# EAGLE board lt mikro workshop mask (EAGLE 7.6.0)
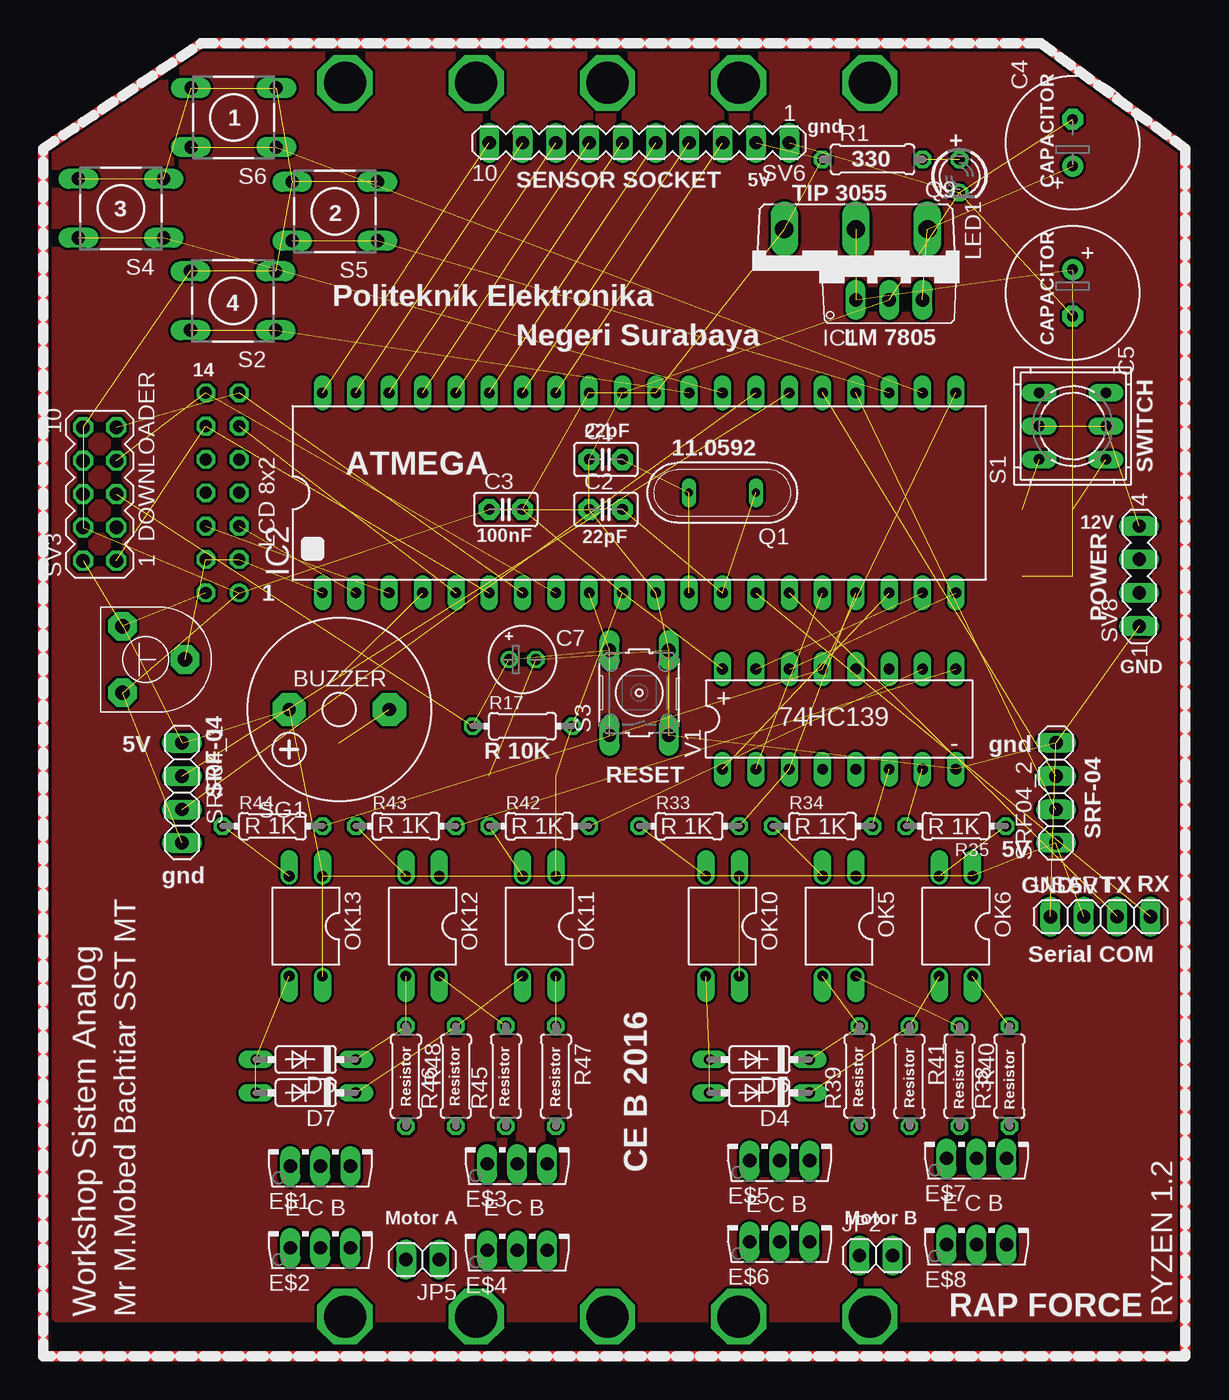
[diagram p0: board, top side]
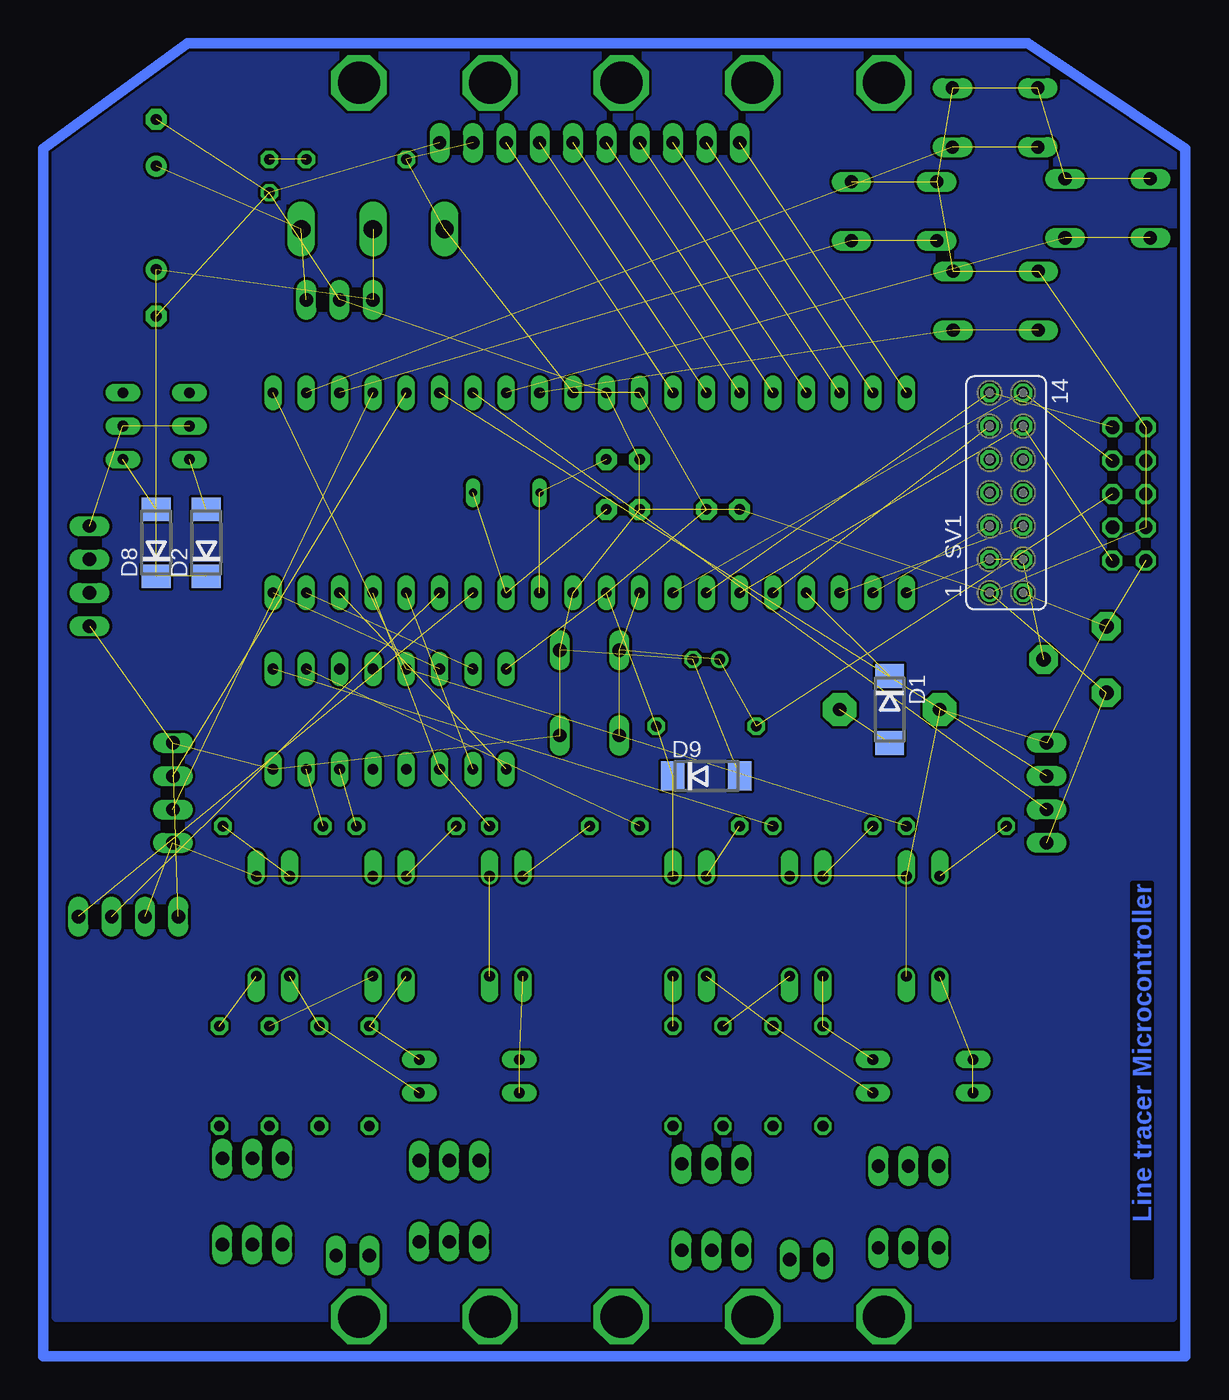
[diagram p1: board, bottom side, seen from below]

No outline drawn. Coordinates in mm, seen from the top.
Copper layers (1*16): Top 0.035mm / dielectric 1.5mm / Bottom 0.035mm
Design rules "default": minimum track width 10mil, minimum drill 24mil, track to track 8mil, track to pad 8mil, pad to pad 8mil, via to via 8mil, smd to smd 8mil, copper to edge 40mil, drill to drill 8mil, minimum pad ring 10mil, minimum via ring 8mil, stop-mask expansion 4mil, vias tented up to drill 0mil, thermal gap 10mil

## Footprints (pad centres in the part's own frame; a part is rotated, then mirrored left to right if it is on the bottom)
C2.5-2 = drill 0.813 pad 1.6 octagon: 1 -1.27,0; 2 1.27,0
E3,5-10 = drill 0.813 pad 1.6: + -1.778,0 | drill 0.813 pad 1.6 octagon: - 1.778,0
E2-5 = drill 0.813 pad 1.27: + -1.016,0 | drill 0.813 pad 1.27 octagon: - 1.016,0
DO214AA = smd 1.8 x 2.2: A 2.55,0; C -2.55,0
DO35-7 = drill 0.813 long: A 3.81,0; C -3.81,0
TO126AV = drill 1.016 long: B 2.286,-1.27; C 0,-1.27; E -2.286,-1.27
TO220V = drill 1.016 long: 1 -2.54,-2.54; 2 0,-2.54; 3 2.54,-2.54
DIL40 = drill 0.813 long: 1 -24.13,-7.62; 2 -21.59,-7.62; 3 -19.05,-7.62; 4 -16.51,-7.62; 5 -13.97,-7.62; 6 -11.43,-7.62; 7 -8.89,-7.62; 8 -6.35,-7.62; 9 -3.81,-7.62; 10 -1.27,-7.62; 11 1.27,-7.62; 12 3.81,-7.62; 13 6.35,-7.62; 14 8.89,-7.62; 15 11.43,-7.62; 16 13.97,-7.62; 17 16.51,-7.62; 18 19.05,-7.62; 19 21.59,-7.62; 20 24.13,-7.62; 21 24.13,7.62; 22 21.59,7.62; 23 19.05,7.62; 24 16.51,7.62; 25 13.97,7.62; 26 11.43,7.62; 27 8.89,7.62; 28 6.35,7.62; 29 3.81,7.62; 30 1.27,7.62; 31 -1.27,7.62; 32 -3.81,7.62; 33 -6.35,7.62; 34 -8.89,7.62; 35 -11.43,7.62; 36 -13.97,7.62; 37 -16.51,7.62; 38 -19.05,7.62; 39 -21.59,7.62; 40 -24.13,7.62
1X02 = drill 1.016 long: 1 -1.27,0; 2 1.27,0
LED3MM = drill 0.813 octagon: A -1.27,0; K 1.27,0
DIL04 = drill 0.813 offset: 1 -1.27,-3.81; 2 1.27,-3.81; 3 1.27,3.81; 4 -1.27,3.81
QS = drill 0.61 long: 1 -2.54,0; 2 2.54,0
TOP3AV = drill 1.397 long: B -5.461,-3.175; C 0,-3.175; E 5.461,-3.175
0207/7 = drill 0.813 octagon: 1 -3.81,0; 2 3.81,0
0204/7 = drill 0.813 octagon: 1 -3.81,0; 2 3.81,0
9077-2 = drill 0.813 long: 1 -2.54,2.54; 2 0,2.54; 3 2.54,2.54; 4 -2.54,-2.54; 5 0,-2.54; 6 2.54,-2.54
DTS-6 = drill 1 long: 1 -3.25,2.25; 2 3.25,2.25; 3 -3.25,-2.25; 4 3.25,-2.25
B3F-10XX = drill 1.016 long: 1 -3.251,2.261; 2 3.251,2.261; 3 -3.251,-2.261; 4 3.251,-2.261
F/CM12P = drill 1.016 pad 2.54 octagon: + 3.81,0; - -3.81,0
1X04 = drill 1.016 long: 1 -3.81,0; 2 -1.27,0; 3 1.27,0; 4 3.81,0
FE07-2 = drill 0.914: 1 -7.62,1.27 | drill 0.914 octagon: 2 -7.62,-1.27; 3 -5.08,1.27; 4 -5.08,-1.27; 5 -2.54,1.27; 6 -2.54,-1.27; 7 0,1.27; 8 0,-1.27; 9 2.54,1.27; 10 2.54,-1.27; 11 5.08,1.27; 12 5.08,-1.27; 13 7.62,1.27; 14 7.62,-1.27
MA05-2 = drill 1.016 octagon: 1 -5.08,-1.27; 2 -5.08,1.27; 3 -2.54,-1.27; 4 -2.54,1.27; 5 0,-1.27; 6 0,1.27; 7 2.54,-1.27; 8 2.54,1.27; 9 5.08,-1.27; 10 5.08,1.27
MA10-1 = drill 1.016 long: 1 -11.43,0; 2 -8.89,0; 3 -6.35,0; 4 -3.81,0; 5 -1.27,0; 6 1.27,0; 7 3.81,0; 8 6.35,0; 9 8.89,0; 10 11.43,0
MA04-1 = drill 1.016 long: 1 -3.81,0; 2 -1.27,0; 3 1.27,0; 4 3.81,0
TRIMPOT = drill 1.1 pad 2.184 octagon: 1 -2.538,1.271; 2 0,-3.5; 3 2.536,1.271
DIL16 = drill 0.813 long: 1 -8.89,-3.81; 2 -6.35,-3.81; 3 -3.81,-3.81; 4 -1.27,-3.81; 5 1.27,-3.81; 6 3.81,-3.81; 7 6.35,-3.81; 8 8.89,-3.81; 9 8.89,3.81; 10 6.35,3.81; 11 3.81,3.81; 12 1.27,3.81; 13 -1.27,3.81; 14 -3.81,3.81; 15 -6.35,3.81; 16 -8.89,3.81

## Placement (x,y rotation side)
C1  22pF  [C2.5-2]  42.85,67.31 0 top
C2  22pF  [C2.5-2]  42.85,63.5 0 top
C3  100nF  [C2.5-2]  35.23,63.5 0 top
C4  [E3,5-10]  78.41,91.44 90 top
C5  [E3,5-10]  78.41,80.01 270 top
C7  10uF  [E2-5]  36.5,52.07 0 top
D1  [DO214AA]  22.53,48.26 270 bottom
D2  [DO214AA]  74.6,60.96 90 bottom
D4  1N4148DO35-7  [DO35-7]  54.55,19.05 180 top
D5  1N4148DO35-7  [DO35-7]  54.55,21.59 180 top
D6  1N4148DO35-7  [DO35-7]  19.99,21.59 180 top
D7  1N4148DO35-7  [DO35-7]  19.99,19.05 180 top
D8  [DO214AA]  78.41,60.96 90 bottom
D9  [DO214AA]  36.5,43.18 0 bottom
E$1  [TO126AV]  21.1,14.73 0 top
E$2  [TO126AV]  21.1,8.51 0 top
E$3  [TO126AV]  36.09,14.91 0 top
E$4  [TO126AV]  36.09,8.32 0 top
E$5  [TO126AV]  56.08,15.16 0 top
E$6  [TO126AV]  56.08,8.98 0 top
E$7  [TO126AV]  71.09,15.33 0 top
E$8  [TO126AV]  71.09,8.77 0 top
IC1  7805TV  [TO220V]  64.44,82.01 0 top
IC2  MEGA16-P  [DIL40]  45.39,64.77 0 top
JP2  [1X02]  63.44,6.65 0 top
JP5  [1X02]  28.88,6.35 180 top
LED1  [LED3MM]  69.79,88.9 270 top
OK5  LTV816  [DIL04]  60.63,31.75 180 top
OK6  LTV816  [DIL04]  69.52,31.75 180 top
OK10  LTV816  [DIL04]  51.74,31.75 180 top
OK11  LTV816  [DIL04]  37.77,31.75 180 top
OK12  LTV816  [DIL04]  28.88,31.75 180 top
OK13  LTV816  [DIL04]  19.99,31.75 180 top
Q1  11.0592MHz  [QS]  51.74,64.77 180 top
Q9  TIP3055  [TOP3AV]  61.9,81.68 180 top
R1  [0207/7]  63.17,90.17 0 top
R17  10K  [0204/7]  36.5,46.99 0 top
R33  1K  [0204/7]  49.2,39.37 0 top
R34  1K  [0204/7]  59.36,39.37 0 top
R35  1K  [0204/7]  69.52,39.37 180 top
R38  [0207/7]  73.6,20.32 90 top
R39  [0207/7]  62.17,20.32 90 top
R40  [0207/7]  69.79,20.32 270 top
R41  [0207/7]  65.98,20.32 270 top
R42  1K  [0204/7]  37.77,39.37 0 top
R43  1K  [0204/7]  27.61,39.37 0 top
R44  1K  [0204/7]  17.45,39.37 0 top
R45  [0207/7]  35.23,20.32 90 top
R46  [0207/7]  31.42,20.32 90 top
R47  [0207/7]  39.04,20.32 270 top
R48  [0207/7]  27.61,20.32 270 top
S1  9077-2  [9077-2]  78.41,69.85 90 top
S2  DTS-6  [DTS-6]  14.45,79.4 180 top
S3  [B3F-10XX]  45.39,49.53 90 top
S4  DTS-6  [DTS-6]  5.91,86.44 180 top
S5  DTS-6  [DTS-6]  22.19,86.22 180 top
S6  DTS-6  [DTS-6]  14.49,93.36 180 top
SG1  F/CM12P  [F/CM12P]  22.53,48.26 180 top
SRF04_1  [1X04]  10.56,41.91 270 top
SRF04_2  [1X04]  77.14,41.91 90 top
SV1  LCD 8x2  [FE07-2]  13.64,64.77 90 bottom
SV3  ISP  [MA05-2]  4.29,64.67 90 top
SV6  [MA10-1]  45.39,91.44 180 top
SV8  [MA04-1]  83.49,58.42 90 top
U$1  TRIMPOT  [TRIMPOT]  7.29,52.07 90 top
USART  [1X04]  80.54,32.47 0 top
V1  74139N  [DIL16]  60.63,47.53 0 top

## Library data of the parts
C1-C3 = capacitor-wima
C4 C5 C7 = rcl
D1 D2 D4-D9 = diode
E$1-E$8 Q9 = transistor-power
IC1 = linear
IC2 = atmel
JP2 JP5 SRF04_1 SRF04_2 USART = pinhead
LED1 = led
OK5 OK6 OK10-OK13 = optocoupler
Q1 = special
R1 R17 R33-R35 R38-R48 = resistor
S1 = switch-misc
S2 S4-S6 = switch-tact
S3 = switch-omron
SG1 = buzzer
SV1 = con-lsta
SV3 SV6 = con-lstb
SV8 = con-lstb; OC_FARNELL: unknown; OC_NEWARK: unknown
U$1 = trimpot
V1 = 74ttl-din

## Nets
GND: C1.1 C2.1 C3.1 C4.- C5.- C7.- D9.A IC1.2 IC2.11 IC2.31 LED1.K S2.3 S2.4 S3.3 S3.4 S4.3 S4.4 S5.3 S5.4 S6.3 S6.4 SRF04_1.4 SRF04_2.4 SV1.1 SV3.4 SV3.6 SV3.8 SV3.10 SV6.1 SV8.1 U$1.1 USART.1 V1.8
MISO: IC2.7 SV1.13 SV3.9
MOSI: IC2.6 SV1.12 SV3.1
N$2: LED1.A R1.2
N$3: D8.A S1.4
N$4: D1.C IC2.4
N$5: SV1.8
N$6: SV1.10
N$7: SV1.7
N$9: C2.2 IC2.13 Q1.1
N$10: C1.2 IC2.12 Q1.2
N$11: D2.A S1.1
N$14: OK10.2 R33.1
N$17: OK5.2 R34.1
N$18: OK6.2 R35.1
N$19: C4.+ IC1.3 Q9.B
N$21: JP2.1
N$22: S1.2 S1.5 SV8.4
N$23: SV1.9
N$24: JP2.2
N$25: R40.2
N$26: R38.1
N$27: R39.1
N$48: R35.2 V1.7
N$49: R34.2 V1.6
N$50: R41.2
N$52: IC2.40 SV6.10
N$53: IC2.33 SV6.3
N$54: IC2.34 SV6.4
N$55: IC2.35 SV6.5
N$56: IC2.36 SV6.6
N$57: IC2.37 SV6.7
N$58: D1.A SG1.-
N$59: OK5.4 R40.1
N$60: IC2.38 SV6.8
N$61: IC2.39 SV6.9
N$62: D5.C OK5.3 R39.2
N$63: OK6.4 R38.2
N$64: D4.C OK6.3 R41.1
N$65: D4.A D5.A OK10.3
N$66: OK12.2 R43.1
N$67: OK11.2 R42.1
N$68: OK13.2 R44.1
N$70: R43.2 V1.9
N$71: R42.2 V1.10
N$72: JP5.1
N$73: JP5.2
N$74: R47.2
N$75: R45.1
N$76: R46.1
N$77: R48.2
N$78: OK11.4 R47.1
N$79: D7.C OK11.3 R46.2
N$80: OK12.4 R45.2
N$81: D6.C OK12.3 R48.1
N$82: D6.A D7.A OK13.3
PB0: IC2.1 SV1.3 SV1.4 U$1.2
PB1: IC2.2 SV1.5
PB2: IC2.3 SV1.6
PB4: IC2.5 SV1.11
PC0: IC2.22 S6.1 S6.2
PC1: IC2.23 S5.1 S5.2
PC2: IC2.24 SRF04_2.2
PC3: IC2.25 SRF04_2.3
PC4: IC2.26 SRF04_1.2
PC5: IC2.27 SRF04_1.3
PC6: IC2.28 S4.1 S4.2
PC7: IC2.29 S2.1 S2.2
PD0: IC2.14 USART.4
PD1: IC2.15 USART.3
PD2: IC2.16 V1.2
PD3: IC2.17 R33.2 V1.3
PD4: IC2.18 V1.1
PD5: IC2.19 V1.15
PD6: IC2.20 V1.14
PD7: IC2.21 R44.2 V1.13
RESET: C7.+ IC2.9 R17.1 S3.1 S3.2 SV3.5
SCK: IC2.8 SV1.14 SV3.7
VCC: C3.2 D9.C IC2.10 IC2.30 IC2.32 OK5.1 OK6.1 OK10.1 OK10.4 OK11.1 OK12.1 OK13.1 OK13.4 Q9.E R1.1 R17.2 SG1.+ SRF04_1.1 SRF04_2.1 SV1.2 SV3.2 SV6.2 U$1.3 USART.2 V1.16
VCC2: C5.+ D2.C D8.C IC1.1 Q9.C

## Tracks (layer width: path | path; a pad name or v marks a point on that pad's centre or on a via)
GND  (32 unrouted)
GND1
  pour Bottom: 12,98 76,98 86,91 86,2 1,2 1,91
  pour Top: 12,98 76,98 86,91 86,2 1,2 1,91
MISO  (2 unrouted)
MOSI  (2 unrouted)
N$2  (1 unrouted)
N$3  (1 unrouted)
N$4  (1 unrouted)
N$8  (via drill 3.2)
  other vias: 52.97,96
N$9  (2 unrouted)
N$10  (2 unrouted)
N$11  (1 unrouted)
N$12  (via drill 3.2)
  other vias: 22.97,96
N$13  (via drill 3.2)
  other vias: 42.97,96
N$14  (1 unrouted)
N$15  (via drill 3.2)
  other vias: 32.97,96
N$16  (via drill 3.2)
  other vias: 62.97,96
N$17  (1 unrouted)
N$18  (1 unrouted)
N$19  (2 unrouted)
N$20  (via drill 3.2)
  other vias: 32.97,2
N$22  (2 unrouted)
N$28  (via drill 3.2)
  other vias: 22.97,2
N$29  (via drill 3.2)
  other vias: 42.97,2
N$30  (via drill 3.2)
  other vias: 52.97,2
N$31  (via drill 3.2)
  other vias: 62.97,2
N$32
  Bottom 0.813: 12,99 76,99 87,91 87,-1 0,-1 0,91 12,99
N$33
  Top 0.813: 0,91 12,99 76,99 87,91 87,-1 0,-1 0,91
N$48  (1 unrouted)
N$49  (1 unrouted)
N$52  (1 unrouted)
N$53  (1 unrouted)
N$54  (1 unrouted)
N$55  (1 unrouted)
N$56  (1 unrouted)
N$57  (1 unrouted)
N$58  (1 unrouted)
N$59  (1 unrouted)
N$60  (1 unrouted)
N$61  (1 unrouted)
N$62  (2 unrouted)
N$63  (1 unrouted)
N$64  (2 unrouted)
N$65  (2 unrouted)
N$66  (1 unrouted)
N$67  (1 unrouted)
N$68  (1 unrouted)
N$70  (1 unrouted)
N$71  (1 unrouted)
N$78  (1 unrouted)
N$79  (2 unrouted)
N$80  (1 unrouted)
N$81  (2 unrouted)
N$82  (2 unrouted)
PB0  (3 unrouted)
PB1  (1 unrouted)
PB2  (1 unrouted)
PB4  (1 unrouted)
PC0  (2 unrouted)
PC1  (2 unrouted)
PC2  (1 unrouted)
PC3  (1 unrouted)
PC4  (1 unrouted)
PC5  (1 unrouted)
PC6  (2 unrouted)
PC7  (2 unrouted)
PD0  (1 unrouted)
PD1  (1 unrouted)
PD2  (1 unrouted)
PD3  (2 unrouted)
PD4  (1 unrouted)
PD5  (1 unrouted)
PD6  (1 unrouted)
PD7  (2 unrouted)
RESET  (5 unrouted)
SCK  (2 unrouted)
VCC  (24 unrouted)
VCC2  (4 unrouted)

## Text on the board
Bottom: Line tracer Microcontroller
_tsilk: 1 | gnd | + | 330 | SENSOR SOCKET | 5V | CAPACITOR | TIP 3055 | 3 | 2 | 4 | Politeknik Elektronika | Negeri Surabaya | LM 7805 | CAPACITOR | 14 | 22pF | 11.0592 | ATMEGA | SWITCH | 12V | DOWNLOADER | LCD 8x2 | 100nF | 22pF | 1 | POWER | GND | BUZZER | + | 74HC139 | 5V | - | gnd | R 10K | RESET | SRF-04 | R 1K | R 1K | R 1K | R 1K | R 1K | R 1K | SRF-04 | 5V | gnd | GND | 5V | TX | RX | Serial COM | Resistor | Resistor | Resistor | Resistor | Resistor | Resistor | Resistor | Resistor | CE B 2016 | E C B | E C B | E C B | E C B | Motor A | Motor B | Workshop Sistem Analog | Mr M.Mobed Bachtiar SST MT | RAP FORCE | RYZEN 1.2